# Allegro board TESTPCB.brd
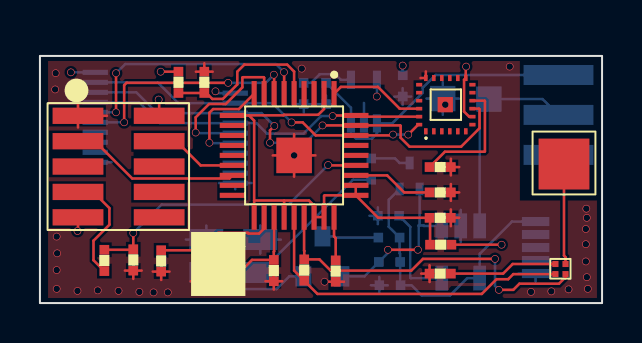
[diagram p0: board, top side]
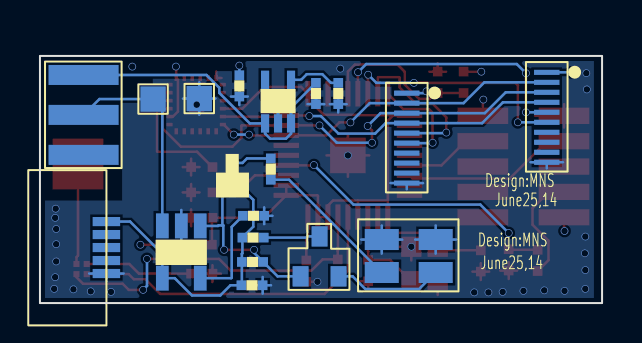
[diagram p1: board, bottom side, seen from below]

Outline 28.14 x 12.37 mm; copper layers: TOP, GND, VCC3V, BOTTOM. Coordinates in mm from the lower left corner of the outline.
Outline path: rectangle 0,0 28.14,12.37

## Placement (name value [footprint] x y rotation side)
C2  10nF  [C0402]  13.89 11.46 270 bottom
C3  1uF  [C0402]  18.85 11.84 270 bottom
C4  22pF  [C0402]  11.02 2.59 270 top
C5  22pF  [C0402]  5.38 3.07 270 top
C7  1uF  [C0402]  19.08 4.85 0 top
C8  1uF  [C0402]  19.08 3.58 0 top
C32  1uF  [C0402]  18.49 0.2 180 bottom
C38  5.6pF  [C0402]  21.01 2.16 180 top
C39  1uF  [C0402]  15.01 11.46 270 bottom
C40  1nF  [C0402]  3.99 3.12 270 top
C42  0.1uF  [C0402]  19.08 6.12 0 top
H1  Header1X1  [ANTENNA]  24.61 5.41 0 top
H5  Header1X1  [H1]  23.22 9.47 180 bottom
H6  Header5X1  [MICROUSB]  24.05 6.68 0 bottom
H8  Header1X1  [H1]  20.9 9.5 180 bottom
H10  Header5X2  [H10]  3.94 6.45 180 bottom
H11  Header5X2  [H10]  10.95 5.41 180 bottom
J2  CON5  [H5X2]  0.38 3.66 0 top
L1  10nH  [L0402]  13.56 0.79 90 top
L2  BEAD  [L0402]  20.93 3.25 180 top
LED1  APBL3025  [LEDAP]  12.22 0.58 180 bottom
Q1  DMP22D6UT  [MOS_DMP]  19.33 5.28 180 bottom
Q2  DMN5L06K  [MOS_DMN]  15.7 0.66 180 bottom
R4  56k  [R0402]  14.48 2.46 270 top
R28  10k  [R0402]  18.36 1.73 180 bottom
R29  8k  [R0402]  16.61 3.61 0 bottom
R40  3.9k  [R0402]  16.26 5.84 90 bottom
R41  100k  [R0402]  7.26 10.19 90 top
R42  200k  [R0402]  7.9 11.91 270 top
R43  1k  [R0402]  18.31 4.04 180 bottom
R44  2.7k  [R0402]  3.56 1.27 90 top
S1  CSS-1210B  [SWITCH]  27.89 6.76 180 bottom
U1  -  [TPS71730]  17.22 8.41 180 bottom
U2  -  [LTC4054]  19.66 4.6 0 bottom
U5  BD2425N50ATI  [BALUN]  25.53 1.19 0 top
U7  1  [CC2510]  12.73 7.39 270 top
U8  -  [MPU9250]  20.32 9.93 90 top
Y1  26MHz  [CRYST_26M]  10.44 0.3 90 top

## Library data of the parts
C2 C3 C39 = C: room: 1
C4 C5 C7 C8 C32 C38 C40 C42 = C
H1 = Header1X1_3
H5 = Header1X1_2: room: 1
H6 = Header1X1_0
H8 = Header1X1_1: room: 1
H10 H11 = Header7X1_0
J2 = CON5_0
L1 L2 = INDUCTOR
LED1 = BRPG1204_0
Q1 = MOSFET P_0
Q2 = DMN5L06K
R4 R28 R29 R40-R44 = R
S1 = SW_0: room: 1
U1 = TPS71730_0: room: 1
U2 = LTC4054_0
U5 = Balun_BD2425N50ATI_1
U7 = cc2510f32rspr_1
U8 = MPU9250_1
Y1 = CRYSTAL_2

## Footprints (pads in the part's own frame, mm; a bottom-side part is the same pattern mirrored in y, then rotated)
ANTENNA
  rect 2.54x2.54 smd: 1(1.626,1.549)
BALUN
  rect 0.305x0.305 smd: 1(0.279,0.762) 2(0.787,0.762) 3(0.787,0.254) 4(0.279,0.254)
C0402
  rect 0.483x0.483 smd: 1(0.432,0.686) 2(1.499,0.686)
CC2510
  rect 1.27x0.254 smd: 1(-3.086,2) 2(-3.086,1.5) 3(-3.086,1) 4(-3.086,0.5) 5(-3.086,0) 6(-3.086,-0.5) 7(-3.086,-1) 8(-3.086,-1.5) 9(-3.086,-2) 19(3.086,-2) 20(3.086,-1.5) 21(3.086,-1) 22(3.086,-0.5) 23(3.086,0) 24(3.086,0.5) 25(3.086,1) 26(3.086,1.5) 27(3.086,2)
  rect 0.254x1.27 smd: 10(-2,-3.086) 11(-1.5,-3.086) 12(-1,-3.086) 13(-0.5,-3.086) 14(0,-3.086) 15(0.5,-3.086) 16(1,-3.086) 17(1.5,-3.086) 18(2,-3.086) 28(2,3.086) 29(1.5,3.086) 30(1,3.086) 31(0.5,3.086) 32(0,3.086) 33(-0.5,3.086) 34(-1,3.086) 35(-1.5,3.086) 36(-2,3.086)
  rect 1.778x1.778 smd: 37(0,0)
CRYST_26M
  rect 1.016x1.016 smd: 1(0.787,0.889) 2(2.515,2.21) 3(2.515,0.889) 4(0.787,2.21)
H1
  rect 1.27x1.27 smd: 1(0.737,0.737)
H5X2
  rect 2.54x0.813 smd: 1(1.524,5.715) 2(5.588,5.715) 3(1.524,4.445) 4(5.588,4.445) 5(1.524,3.175) 6(5.588,3.175) 7(1.524,1.905) 8(5.588,1.905) 9(1.524,0.635) 10(5.588,0.635)
H10
  rect 1.27x0.254 smd: 1(1.168,5.097) 2(1.168,4.597) 3(1.168,4.097) 4(1.168,3.596) 5(1.168,3.096) 6(1.168,2.596) 7(1.168,2.096) 8(1.168,1.596) 9(1.168,1.096) 10(1.168,0.596)
L0402
  rect 0.483x0.483 smd: 1(0.33,0.33) 2(1.397,0.33)
LEDAP
  rect 1.7x1.05 smd: 1(1.187,0.945) 2(1.187,2.595) 3(3.887,0.945) 4(3.887,2.595)
LTC4054
  rect 0.635x1.245 smd: 1(0.457,0.737) 2(1.407,0.737) 3(2.357,0.737) 4(2.357,3.353) 5(0.457,3.353)
MICROUSB
  rect 1.372x0.457 smd: 1(0.762,2.601) 2(0.762,3.251) 3(0.762,3.901) 4(0.762,4.552) 5(0.762,5.202)
MOS_DMN
  rect 0.8x1.016 smd: 1(0.605,0.676) 2(2.504,0.676) 3(1.554,2.676)
MOS_DMP
  rect 0.4x0.635 smd: 1(0.32,0.43) 2(1.32,0.43) 3(0.82,1.73)
MPU9250
  rect 0.305x0.178 smd: 1(-1.333,1) 2(-1.333,0.6) 3(-1.333,0.2) 4(-1.333,-0.2) 5(-1.333,-0.6) 6(-1.333,-1) 13(1.333,-1) 14(1.333,-0.6) 15(1.333,-0.2) 16(1.333,0.2) 17(1.333,0.6) 18(1.333,1)
  rect 0.178x0.305 smd: 7(-1,-1.333) 8(-0.6,-1.333) 9(-0.2,-1.333) 10(0.2,-1.333) 11(0.6,-1.333) 12(1,-1.333) 19(1,1.333) 20(0.6,1.333) 21(0.2,1.333) 22(-0.2,1.333) 23(-0.6,1.333) 24(-1,1.333)
  rect 0.762x0.762 smd: 25(0,0.025)
R0402
  rect 0.483x0.483 smd: 1(0.33,0.33) 2(1.397,0.33)
SWITCH
  rect 3.505x1 smd: 1(1.93,4.661) 2(1.93,2.661) 3(1.93,0.661)
TPS71730
  rect 0.406x0.914 smd: 1(0.349,0.584) 2(0.999,0.584) 3(1.649,0.584) 4(1.649,2.769) 5(0.349,2.769)

## Nets
GND: C2.2 C3.2 C4.2 C5.2 C7.2 C8.2 C32.2 C38.2 C39.2 C40.2 C42.2 H6.5(GND) H8.1 H10.10 H11.10 J2.1 LED1.2(-1) LED1.4(-2) R4.2 R42.1 R43.2 U1.2(GND) U2.2(GND) U7.37(GND EXPOSED) U8.18(GND) U8.25 Y1.3(GND#3) Y1.4(GND#4)
VBAT: C39.1 S1.1(R) U1.1(IN) U1.3(EN)
VCC1: C8.1 L2.2 U7.2(DVDD#2) U7.10(DVDD#10) U7.19(AVDD#19) U7.22(AVDD#22) U7.25(AVDD#25) U7.26(AVDD#26) U7.28(GUARD) U7.29(AVDD_DREG)
VCC3V: C3.1 H10.1 H11.1 J2.2 J2.9 L2.1 R41.2 U1.5(OUT) U8.8(VDDIO) U8.13(VDD)
ANT_OUT: H1.1 U5.2(UB_PORT)
BAT: H5.1 S1.2(COM) U2.3(BAT)
RESET_N: C40.1 R44.2 U7.31(RESET_N)
SPI_MISO: H10.3 H11.3 U7.35(P1_4) U8.9(AD0/SDO)
SPI_MOSI: H10.2 H11.2 U7.34(P1_5) U8.24(SDA/SDI)
SPI_NCS_S1: H10.5 U7.6(P0_1)
SPI_NCS_S2: H10.6 U7.7(P0_2)
SPI_NCS_S3: H11.5 U7.8(P0_3)
SPI_NCS_S4: H11.6 U7.9(P0_4)
SPI_NCS_S5: U7.1(P1_2) U8.22(NCS)
SPI_SCK: H10.4 H11.4 U7.36(P1_3) U8.23(SCL/SCLK)
V_5V: C32.1 H6.1(5V) Q1.2(DRAIN) R28.1 R29.2 U2.4(VCC)
N11091536: C2.1 U1.4(NR/FB)
N11092557: Q2.3(D) R29.1
N11092561: Q1.1(GATE) Q2.1(G) R28.2 U2.1(\\C\H\R\G)
N11092589: LED1.3(GREEN) Q2.2(S)
N11092593: LED1.1(RED) R40.1
N11092605: Q1.3(SOURCE) R40.2
N11092741: R43.1 U2.5(PROG)
N11093803: L1.2 U5.3(B_PORT1) U7.24(RF_N)
N11093819: L1.1 U5.4(B_PORT2) U7.23(RF_P)
N11093827: R41.1 R42.2 U7.5(P0_0)
N11093995: C7.1 U7.30(DCOUPL)
N11094063: R4.1 U7.27(RBIAS)
N11094099: C4.1 U7.21(XOSC_Q1) Y1.1
N11094111: C5.1 U7.20(XOSC_Q2) Y1.2
N11094475: J2.7 R44.1
N11094487: J2.3 U7.16(P2_2)
N11094491: J2.4 U7.15(P2_1)
N11094547: C38.1 U5.1(GND)
N11099235: C42.1 U8.10(REGOUT)

Pads without a net: H6 2 3 4; H10 7 8 9; H11 7 8 9; J2 5 6 8 10; S1 3; U7 3 4 11 12 13 14 17 18 32 33; U8 1 2 3 4 5 6 7 11 12 14 15 16 17 19 20 21

## Via types
v1: diameter 0.381, hole 0.33, TOP to BOTTOM, 58 vias

## Routing (per net, layer and track width the routed paths; a pad name or vN(x,y) marks a point on that pad's centre or on a via; arc(x,y) is an arc through that point)
GND: length 51.2
  TOP w0.127: 5.65,1.57 C5.2 ; C5.2 6.07,1.99 ; C5.2 6.49,1.57 ; C5.2 6.07,1.16 ; J2.1 3.35,9.37 ; J2.1 1.91,8.79 ; J2.1 1.91,9.96 ; 11.71,0.67 C4.2 ; C4.2 11.29,1.09 ; C4.2 11.71,1.51 ; C4.2 12.13,1.09 ; Y1.4 8.23,1.78 ; Y1.4 7.54,1.09 ; Y1.4 8.23,0.41 ; C8.2 20.99,4.27 ; C8.2 20.57,3.85 ; C8.2 20.57,4.69 ; C8.2 20.15,4.27 ; v1(12.73,7.39) 13.79,7.39 ; v1(12.73,7.39) 12.73,6.32 ; v1(12.73,7.39) 12.73,8.46 ; v1(12.73,7.39) 11.66,7.39 ; 14.39,1.07 R4.2 15.23,1.07 ; C40.2 4.67,2.05 ; C40.2 4.25,1.63 ; C40.2 5.09,1.63 ; C40.2 4.67,1.21 ; R42.1 8.65,11.58 ; R42.1 7.81,11.58 ; R42.1 8.23,12 ; 19.32,11.6 U8.18 19.05,11.26 ; C7.2 20.57,5.96 ; C7.2 20.99,5.54 ; C7.2 20.15,5.54 ; C7.2 20.57,5.12 ; 19.51,1.05 C38.2 ; C38.2 19.09,1.47 ; C38.2 19.93,1.47 ; C38.2 19.51,1.89 ; 10.24,2.82 v1(9.55,2.82) 9.55,2.13 ; 20.57,6.39 C42.2 ; C42.2 20.15,6.81 ; C42.2 20.57,7.23 ; C42.2 20.99,6.81
  GND w0.127: 0.86,3.35 v1(0.84,3.33)
  BOTTOM w0.127: 17.74,10.34 C3.2 ; C3.2 18.16,10.76 ; C3.2 18.16,9.92 ; C3.2 18.58,10.34 ; 16.57,0.89 C32.2 ; C32.2 16.99,1.31 ; C32.2 16.99,0.47 ; C32.2 17.41,0.89 ; H8.1 20.17,11.05 ; H8.1 20.98,10.24 ; H8.1 20.17,9.42 ; H8.1 19.35,10.24 ; C2.2 13.63,9.96 ; C2.2 13.21,9.54 ; C2.2 13.21,10.38 ; C2.2 12.79,9.96 ; 7.3,3.18 LED1.4 ; LED1.4 8.33,2.48 ; LED1.4 9.36,3.18 ; LED1.4 8.33,3.88 ; 16.92,3.95 R43.2 ; R43.2 16.5,4.37 ; R43.2 16.92,4.79 ; 23.95,1.48 H6.5 ; H6.5 24.82,1.07 ; H6.5 25.68,1.48 ; 1.96,7.05 H10.10 ; H10.10 3.58,7.05 ; H10.10 2.77,6.74 ; LED1.2 11.03,3.88 ; LED1.2 12.06,3.18 ; LED1.2 10,3.18 ; LED1.2 11.03,2.48 ; H11.10 10.59,6.01 ; H11.10 8.97,6.01 ; H11.10 9.78,5.7 ; C39.2 14.75,9.96 ; C39.2 13.91,9.96 ; C39.2 14.33,10.38 ; 21.07,4.66 U2.2 21.07,3.06 ; 16.22,10.02 U1.2
  vias: v1(0.76,10.69) v1(0.79,11.51) v1(0.86,2.49) v1(0.84,1.65) v1(0.84,0.71) v1(1.88,0.61) v1(2.9,0.64) v1(3.94,0.61) v1(4.98,0.56) v1(5.69,0.53) v1(6.4,0.53) v1(13.11,11.73) v1(14.25,1.07) v1(20.29,9.93) v1(23.52,11.84) v1(24.59,0.56) v1(25.6,0.58) v1(26.47,0.69) v1(27.36,4.72) v1(27.33,3.71) v1(27.33,2.95) v1(27.33,2.08) v1(27.38,4.27) v1(27.38,1.3) v1(27.43,0.71)
VBAT: length 15.3
  BOTTOM w0.127: C39.1 15.57,9.78 U1.3 15.57,8.48 15.83,8.23 16.62,8.23 16.87,8.48 U1.1 17.63,8.99 19.16,10.52 19.16,10.78 19.81,11.42 S1.1
VCC1: length 24.4
  TOP w0.127: U7.28 16.94,4.27 C8.1 19.53,4.24 L2.2 ; U7.28 14.26,5.39 14.23,5.36 U7.26 U7.25 13.73,4.88 13.47,5.13 12.23,5.13 ; U7.28 U7.29 ; 10.73,5.13 10.73,9.13 10.46,9.39 ; 10.73,5.13 U7.19 ; 10.73,5.13 12.23,5.13 ; 10.46,9.39 10.46,9.4 12.19,9.4 12.22,9.42 13.93,9.42 14.23,9.72 U7.2 ; 10.46,9.39 U7.10 ; 12.23,5.13 U7.22
VCC3V: length 11.3
  TOP w0.127: J2.2 5.97,10.16 v1(5.94,10.19) ; L2.1 v1(23.11,2.92) ; J2.9 1.91,3.63 v1(1.88,3.61) ; v1(21.34,11.84) 21.32,11.82 U8.13 21.23,11.18 21.23,9.59 21.49,9.33 U8.8 ; R41.2 v1(6.05,11.58)
  BOTTOM w0.127: v1(16.87,10.34) 16.87,10.34 U1.5 ; H11.1 8.88,10.51 v1(8.79,10.6) ; H10.1 v1(1.55,11.55) ; C3.1 v1(18.16,11.89)
ANT_OUT: length 5
  TOP w0.127: U5.2 26.31,2.3 26.24,2.37 H1.1
BAT: length 10.3
  BOTTOM w0.127: S1.2 25.17,10.21 H5.1 22.02,9.75 U2.3
RESET_N: length 14.8
  TOP w0.127: v1(4.67,3.51) C40.1 4.65,2.67 R44.2 ; v1(14.43,6.91) 14.44,6.89 U7.31
  BOTTOM w0.127: v1(4.67,3.51) 6.1,4.93 12.45,4.93 v1(14.43,6.91)
SPI_MISO: length 23.9
  TOP w0.127: v1(11.73,8.86) 11.52,8.65 v1(11.52,8.03) ; v1(14.15,8.89) U7.35 18.03,8.89 18.06,8.87 18.06,8.27 18.5,7.83 21.09,7.83 22.01,8.75 22.01,9.71 21.98,9.73 U8.9
  BOTTOM w0.127: v1(11.52,8.03) 13.28,8.03 v1(14.15,8.89) ; v1(11.73,8.86) 11.09,9.51 H11.3 5.87,9.51 4.83,10.55 H10.3
SPI_MOSI: length 17.5
  TOP w0.127: v1(12.6,9.04) 13.15,9.04 13.8,8.39 U7.34 17.64,8.39 v1(17.68,8.43) ; U8.24 18.94,8.93 v1(18.44,8.43)
  BOTTOM w0.127: v1(18.44,8.43) v1(17.68,8.43) ; v1(12.6,9.04) 11.63,10.01 H11.2 6.93,10.01 5.89,11.05 H10.2
SPI_NCS_S1: length 12.8
  TOP w0.127: v1(3.81,9.55) v1(3.81,11.51) ; v1(12.22,11.56) 12.23,11.55 U7.6
  BOTTOM w0.127: v1(3.81,11.51) 4.27,11.96 11.81,11.96 v1(12.22,11.56) ; H10.5 v1(3.81,9.55)
SPI_NCS_S2: length 12
  TOP w0.127: v1(11.71,11.43) 11.73,11.41 U7.7 ; v1(4.22,9.05) 4.22,10.91 4.33,11.02 v1(9.42,11.02)
  BOTTOM w0.127: v1(11.71,11.43) 11.3,11.02 v1(9.42,11.02) ; H10.6 v1(4.22,9.05)
SPI_NCS_S3: length 8.1
  TOP w0.127: v1(7.8,8.53) 7.8,9.3 8.46,9.96 9.3,9.96 10.13,10.8 10.13,11.28 10.16,11.3 11.2,11.3 11.23,11.28 U7.8
  BOTTOM w0.127: H11.5 7.83,8.51 v1(7.8,8.53)
SPI_NCS_S4: length 5.4
  TOP w0.127: v1(8.48,8.03) 8.48,9.53 8.67,9.71 9.96,9.71 U7.9
  BOTTOM w0.127: v1(8.48,8.03) 8.5,8.01 H11.6
SPI_NCS_S5: length 4.9
  TOP w0.127: U8.22 18.01,9.73 16.92,10.82 15.07,10.82 U7.1
SPI_SCK: length 17.3
  TOP w0.127: v1(14.66,9.36) 14.69,9.39 U7.36 15.87,9.33 U8.23
  BOTTOM w0.127: v1(14.66,9.36) 14.08,9.36 13.2,8.48 11.36,8.48 10.84,9.01 H11.4 6,9.01 4.96,10.05 H10.4
V_5V: length 14.5
  BOTTOM w0.127: Q1.2 17.46,5.17 17.46,3.82 R29.2 18.01,2.49 18.03,2.46 R28.1 18.03,0.91 C32.1 18.61,0.89 19.11,0.38 20.53,0.38 21.39,1.24 U2.4 22.02,2.46 23.63,4.08 H6.1
N11091536: length 2.7
  BOTTOM w0.127: U1.4 15.06,11.18 14.79,11.46 14.01,11.46 13.57,11.02 C2.1
N11092557: length 2.8
  BOTTOM w0.127: R29.1 14.79,3.28 14.73,3.34 Q2.3
N11092561: length 8.7
  TOP w0.127: v1(17.42,2.67) v1(18.92,2.67)
  BOTTOM w0.127: v1(17.42,2.67) 17.42,2.51 R28.2 16.25,1.34 Q2.1 ; v1(18.92,2.67) 18.96,2.71 18.96,3.89 19.01,3.89 ; U2.1 19.23,3.86 19.2,3.89 19.01,3.89 ; 19.01,3.89 Q1.1
N11092589: length 5.5
  BOTTOM w0.127: Q2.2 12.49,1.34 11.85,0.7 9.16,0.7 LED1.3
N11092593: length 7.5
  BOTTOM w0.127: R40.1 15.67,6.17 LED1.1
N11092605: length 2
  BOTTOM w0.127: R40.2 17.78,7.24 18,7.01 Q1.3
N11092741: length 4.9
  BOTTOM w0.127: U2.5 18.57,1.24 18.54,1.27 18.54,3.81 R43.1
N11093803: length 17.5
  TOP w0.127: U7.24 13.23,2.62 13.23,2.61 L1.2 14,2.18 14.55,1.63 18.59,1.63 19.18,2.21 v1(22.78,2.21) ; U5.3 26.31,1.3 25.98,0.97 24,0.97 23.7,0.66 v1(22.98,0.66)
  BOTTOM w0.127: v1(22.98,0.66) 22.78,0.86 v1(22.78,2.21)
N11093819: length 16.7
  TOP w0.127: U5.4 23.7,1.45 23.44,1.19 22.86,1.19 22.12,0.46 13.89,0.46 L1.1 12.73,1.63 U7.23
N11093827: length 8.3
  TOP w0.127: R41.1 R42.2 8.33,10.52 8.63,10.22 9.16,10.22 9.88,10.94 9.88,11.58 10.24,11.94 12.38,11.94 12.73,11.59 U7.5
N11093995: length 4
  TOP w0.127: U7.30 17.38,6.39 18.24,5.54 C7.1
N11094063: length 2.2
  TOP w0.127: R4.1 14.81,3.25 14.73,3.33 U7.27
N11094099: length 4.8
  TOP w0.127: U7.21 11.73,2.59 11.71,2.58 C4.1 10.62,2.16 Y1.1
N11094111: length 6.2
  TOP w0.127: U7.20 11.23,3.73 10.97,3.48 10.45,3.48 10.41,3.52 8.93,3.52 Y1.2 8.05,2.64 C5.1
N11094475: length 5.6
  TOP w0.127: J2.7 2.67,5.56 3.48,4.75 3.48,3.92 2.68,3.12 2.68,2.15 R44.1
N11094487: length 8.6
  TOP w0.127: J2.3 2.75,8.1 4.62,6.24 9.48,6.24 U7.16
N11094491: length 4.2
  TOP w0.127: J2.4 6.83,8.1 8.04,6.89 U7.15
N11094547: length 5.4
  TOP w0.127: C38.1 23.19,1.47 23.67,1.96 U5.1
N11099235: length 6.2
  TOP w0.127: U8.10 22.25,10.13 22.28,10.11 22.28,7.6 22.25,7.58 20.28,7.58 C42.1

## Copper pours and planes (outline as drawn; the poured copper is in the pictures)
GND on TOP: 0.41,0.25 0.41,12.12 24.03,12.12 24.03,5.13 27.89,5.13 27.89,0.25 ; 13 cut-outs
GND on BOTTOM: 0.41,0.25 0.41,12.12 27.89,12.12 27.89,8.81 27.86,8.84 24.08,8.84 24.03,8.79 24.03,5.13 27.89,5.13 27.89,0.25 ; 8 cut-outs
GND on GND: 0.41,0.25 0.41,12.12 27.89,12.12 27.89,0.25
VCC3V on VCC3V: 0.41,0.25 0.41,12.12 27.89,12.12 27.89,0.25

## Text on the board
Ref Des/Silkscreen Bottom: June25,14 | Design:MNS
